# Altium PCB IMU_board_rev2.PcbDoc
Units mil, origin at the board's own origin, x right, y up, seen from the top; angles counter-clockwise.
Board outline 2805 x 1891.31 mil, 2 copper layers (Top Layer, Bottom Layer); 43 components, 29 nets, 150 pads, 25 vias.
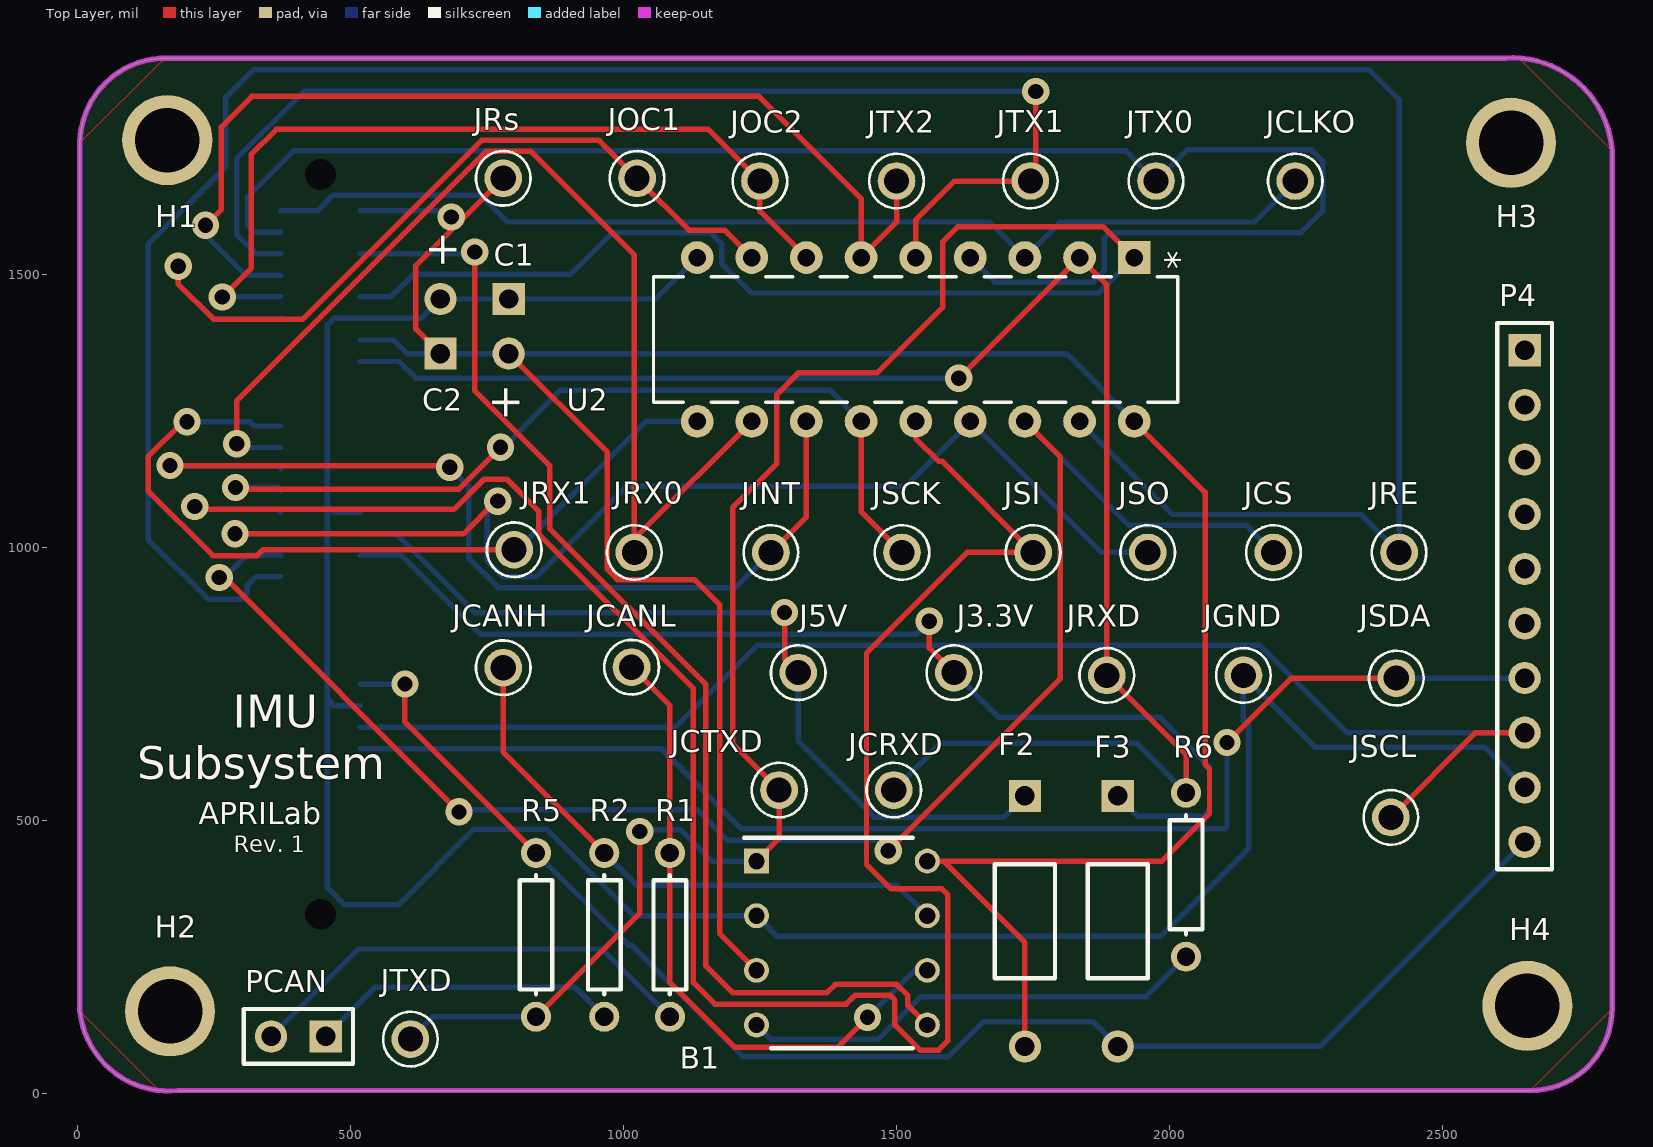
[diagram p0: Top Layer view]
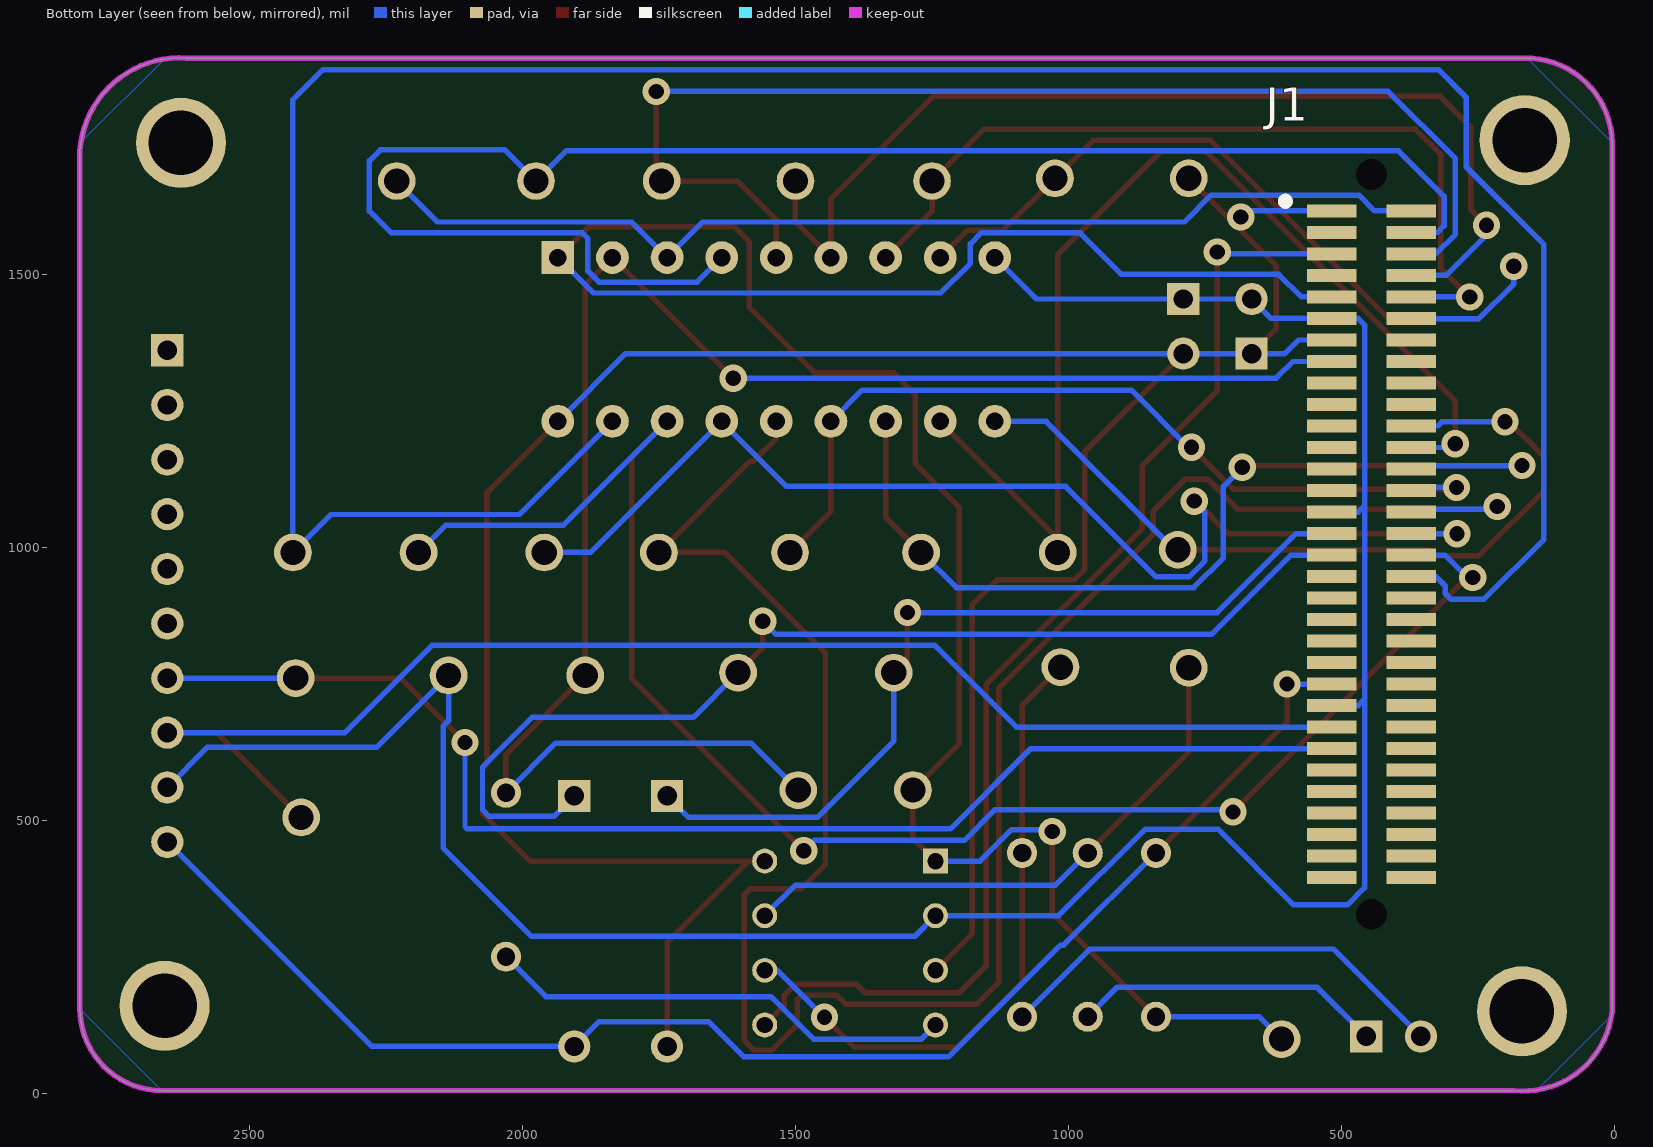
[diagram p1: Bottom Layer view, seen from below]

## Layer stack, top to bottom
Top Solder: solder mask 0.4, Solder Resist, Dk 3.5
Top Layer: signal copper 1.4
Dielectric 1: dielectric 12.6, FR-4, Dk 4.8
Bottom Layer: signal copper 1.4
Bottom Solder: solder mask 0.4, Solder Resist, Dk 3.5

## Board outline
5,150.94 5,1740.94 cw(c162.5,1738.44) 165,1895.94 2615,1895.94 cw(c2627.5,1713.44) 2810,1725.94 2810,155.94 cw(c2660,155.94) 2660,5.94 185,5.94 cw(c167.5,168.44)

## Design rules (kind name [scope] priority, off if disabled: settings)
Clearance [All] p1: gap=10 ignorepadtopadclearanceinfootprint=FALSE except(0: Arc-Hole Track-Hole SMDPad-Hole THPad-Hole Via-Hole Fill-Hole Poly-Hole Region-Hole Text-Hole)
MinimumSolderMaskSliver [All] p1: minsoldermaskwidth=5
PolygonConnect [All] p1: connectstyle=Relief reliefconductorwidth=10 reliefentries=4 polygonreliefangle="90 Angle" airgapwidth=10
RoutingVias [All] p1: holewidth=28 width=50 viastyle="Through Hole" minholewidth=28 minwidth=50 maxholewidth=28 maxwidth=50
SolderMaskExpansion [All] p1: expansion=4 istentingtop=FALSE
Width [All] p1: maxlimit=10 minlimit=10 preferedwidth=10
29 further rules are at their usual default settings.

## Components (designator, comment, footprint, x,y, rotation, side; value= is the part's Value field where it differs from the comment)
B1 "MCP2551-I_P" DIP794W56P254L946H432Q8N 1400,275.94 r0 top
C1 "Cap" "Cap Pol" 790,1455 r270 top value=100nF
C2 "Cap Pol1" "Cap Pol" 665,1355 r90 top value=50uF
F2 "Fuse 2" PIN-W2/E2.8 1735,315.94 r270 top
F3 "Fuse 1" PIN-W2/E2.8 1905,315.94 r270 top
H1 "Hole 3mm" "Hole 3mm" 165,1745.94 r0 top
H2 "Hole 3mm" "Hole 3mm" 170,150.94 r0 top
H3 "Hole 3mm" "Hole 3mm" 2625,1740.94 r0 top
H4 "Hole 3mm" "Hole 3mm" 2655,160.94 r0 top
J1 "0714360164" 0714360164 445.63,1005.94 r270 bottom
J3.3V "5000" KEYSTONE_5000 1605,770.94 r90 top
J5V "5000" KEYSTONE_5000 1320,770.94 r0 top
JCANH "5000" KEYSTONE_5000 780,780 r90 top
JCANL "5000" KEYSTONE_5000 1015,780.94 r90 top
JCLKO "5000" KEYSTONE_5000 2230,1670.94 r270 top
JCRXD "5000" KEYSTONE_5000 1495,555.94 r90 top
JCS "5000" KEYSTONE_5000 2190,990.94 r0 top
JCTXD "5000" KEYSTONE_5000 1285,555.94 r90 top
JGND "5000" KEYSTONE_5000 2135,765.94 r90 top
JINT "5000" KEYSTONE_5000 1270,990.94 r90 top
JOC1 "5000" KEYSTONE_5000 1025,1675.94 r180 top
JOC2 "5000" KEYSTONE_5000 1250,1670.94 r270 top
JRE "5000" KEYSTONE_5000 2420,990.94 r0 top
JRs "5000" KEYSTONE_5000 780,1675.94 r180 top
JRX0 "5000" KEYSTONE_5000 1020,990.94 r90 top
JRX1 "5000" KEYSTONE_5000 800,995.94 r0 top
JRXD "5000" KEYSTONE_5000 1885,765.94 r90 top
JSCK "5000" KEYSTONE_5000 1510,990.94 r90 top
JSCL "5000" KEYSTONE_5000 2405,505.94 r90 top
JSDA "5000" KEYSTONE_5000 2415,760.94 r90 top
JSI "5000" KEYSTONE_5000 1750,990.94 r0 top
JSO "5000" KEYSTONE_5000 1960,990.94 r0 top
JTX0 "5000" KEYSTONE_5000 1975,1670.94 r270 top
JTX1 "5000" KEYSTONE_5000 1745,1670.94 r180 top
JTX2 "5000" KEYSTONE_5000 1500,1670.94 r270 top
JTXD "5000" KEYSTONE_5000 610,100 r90 top
P4 "IMU MPU6050" HDR1X10 2650,1360.94 r270 top
PCAN "Header 2" HDR1X2 455,105 r180 top
R1 "Res1" AXIAL-0.3 1085,290.94 r90 top value=0
R2 "Res1" AXIAL-0.3 965,290.94 r90 top value=120
R5 "Res1" AXIAL-0.3 840,290.94 r90 top value=40
R6 "Res1" AXIAL-0.3 2030,400.94 r90 top value=150
U2 "MCP2510-I/P SPI Interface" PDIP18_300MC_MCH 1935,1530.94 r270 top

## Footprints (in the part's own frame and the unit in brackets; to place one, negate y for a bottom-side part, rotate by r counter-clockwise, add the part's x,y. Pads: shape width x height; smd on the part's side, far side on the other; paste and mask are expansions set on the pad)
0714360164 [mm]
  rect 0.6x2.3 smd: 1(-15.5,-1.85) 2(-15.5,1.85) 3(-14.5,-1.85) 4(-14.5,1.85) 5(-13.5,-1.85) 6(-13.5,1.85) 7(-12.5,-1.85) 8(-12.5,1.85) 9(-11.5,-1.85) 10(-11.5,1.85) 11(-10.5,-1.85) 12(-10.5,1.85) 13(-9.5,-1.85) 14(-9.5,1.85) 15(-8.5,-1.85) 16(-8.5,1.85) 17(-7.5,-1.85) 18(-7.5,1.85) 19(-6.5,-1.85) 20(-6.5,1.85) 21(-5.5,-1.85) 22(-5.5,1.85) 23(-4.5,-1.85) 24(-4.5,1.85) 25(-3.5,-1.85) 26(-3.5,1.85) 27(-2.5,-1.85) 28(-2.5,1.85) 29(-1.5,-1.85) 30(-1.5,1.85) 31(-0.5,-1.85) 32(-0.5,1.85) 33(0.5,-1.85) 34(0.5,1.85) 35(1.5,-1.85) 36(1.5,1.85) 37(2.5,-1.85) 38(2.5,1.85) 39(3.5,-1.85) 40(3.5,1.85) 41(4.5,-1.85) 42(4.5,1.85) 43(5.5,-1.85) 44(5.5,1.85) 45(6.5,-1.85) 46(6.5,1.85) 47(7.5,-1.85) 48(7.5,1.85) 49(8.5,-1.85) 50(8.5,1.85) 51(9.5,-1.85) 52(9.5,1.85) 53(10.5,-1.85) 54(10.5,1.85) 55(11.5,-1.85) 56(11.5,1.85) 57(12.5,-1.85) 58(12.5,1.85) 59(13.5,-1.85) 60(13.5,1.85) 61(14.5,-1.85) 62(14.5,1.85) 63(15.5,-1.85) 64(15.5,1.85)
  round 0.715 hole 1.43 unplated: MH1(-17.2,0) MH2(17.2,0)
  silkscreen extent -16,-4.05 -15.9,-3.95
AXIAL-0.3 [mm] "Axial Device, Thru-Hole; 2 Leads; 0.3 in Pin Spacing"
  round 1.4 hole 0.85: 1(-3.81,0) 2(3.81,0)
  silkscreen extent -2.77,-0.76 2.77,0.76
"Cap Pol" [mm]
  rect 1.5x1.5 hole 0.9: 1(0,0)
  round 1.5 hole 0.9: 2(2.54,0)
DIP794W56P254L946H432Q8N [mm]
  rect 1.16x1.16 / inner round 1.16 / far side rect 1.16x1.16 hole 0.76: 1(-3.97,3.81)
  round 1.16 hole 0.76: 2(-3.97,1.27) 3(-3.97,-1.27) 4(-3.97,-3.81) 5(3.97,-3.81) 6(3.97,-1.27) 7(3.97,1.27) 8(3.97,3.81)
  silkscreen extent -4.55,-4.89 3.3,4.89
HDR1X2 [mm] "Connector; Header; 2 Position"
  rect 1.5x1.5 hole 0.9: 1(0,0)
  round 1.5 hole 0.9: 2(2.54,0)
  silkscreen extent -1.27,-1.27 3.81,1.27
HDR1X10 [mm] "Connector; Header; 10 Position"
  rect 1.5x1.5 hole 0.9: 1(0,0)
  round 1.5 hole 0.9: 2(2.54,0) 3(5.08,0) 4(7.62,0) 5(10.16,0) 6(12.7,0) 7(15.24,0) 8(17.78,0) 9(20.32,0) 10(22.86,0)
  silkscreen extent -1.27,-1.27 24.13,1.27
"Hole 3mm" [mil]
  round 165 hole 118.11: 1(0,0)
KEYSTONE_5000 [mm]
  round 1.755 hole 1.17: 1(0,0)
  silkscreen extent -1.27,-1.27 1.27,1.27
PDIP18_300MC_MCH [mil]
  rect 60x60 hole 32 mask+0: 1(0,0)
  round 60 hole 32 mask+0: 2(0,-100) 3(0,-200) 4(0,-300) 5(0,-400) 6(0,-500) 7(0,-600) 8(0,-700) 9(0,-800) 10(300,-800) 11(300,-700) 12(300,-600) 13(300,-500) 14(300,-400) 15(300,-300) 16(300,-200) 17(300,-100) 18(300,0)
  silkscreen extent 35,-880 265,80, body extent -5,-875 315,75, height 205
PIN-W2/E2.8 [mm] "Thru-Hole; 2 Leads"
  rect 1.5x1.5 hole 0.9: 1(-5.825,0)
  round 1.5 hole 0.9: 2(5.825,0)
  silkscreen extent -2.65,-1.4 2.65,1.4

## Part data
B1: "High Speed CAN Transceiver,MCP2551-I/P Microchip MCP2551-I/P, CAN Transceiver 1-channel ISO 11898, 8-Pin PDIP", Arrow Part Number=MCP2551-I/P, Manufacturer_Name=Microchip, Mouser Part Number=579-MCP2551-I/P, Arrow Price/Stock=https://www.arrow.com/en/products/mcp2551-ip/microchip-technology?region=nac, Datasheet Link=http://www.mouser.com/ds/2/268/21667d-63675.pdf, Geometry.Height=4.32mm, Manufacturer_Part_Number=MCP2551-I/P, Mouser Price/Stock=https://www.mouser.co.uk/ProductDetail/Microchip-Technology-Atmel/MCP2551-I-P?qs=8g3RLJaa2Uis1lC9gEMPXA%3D%3D
C1: "Capacitor", LatestRevisionDate=17-Jul-2002, LatestRevisionNote="Re-released for DXP Platform.", PackageDescription="Radial Cap, Thru-Hole; 2 Leads; 0.3 in Pin Spacing", PackageReference=RAD-0.3, Published=8-Jun-2000, Publisher="Altium Limited"
C2: "Polarized Capacitor (Radial)", LatestRevisionDate=17-Jul-2002, LatestRevisionNote="Re-released for DXP Platform.", PackageDescription="Polarized Capacitor (Radial); 2 Leads", PackageReference=RB7.6-15, Published=8-Jun-2000, Publisher="Altium Limited"
F2: library part "Fuse 1", "Fuse", LatestRevisionDate=17-Jul-2002, LatestRevisionNote="Re-released for DXP Platform.", PackageDescription="Thru-Hole; 2 Leads", PackageReference=PIN-W2/E2.8, Published=8-Jun-2000, Publisher="Altium Limited"
F3: "Fuse", LatestRevisionDate=17-Jul-2002, LatestRevisionNote="Re-released for DXP Platform.", PackageDescription="Thru-Hole; 2 Leads", PackageReference=PIN-W2/E2.8, Published=8-Jun-2000, Publisher="Altium Limited"
J1: "Board to Board & Mezzanine Connectors 1.00MM PLG 02X32P VT SMT", Manufacturer_Name=Molex, Mouser Part Number=N/A, Arrow Part Number=0714360164, Arrow Price/Stock=https://www.arrow.com/en/products/0714360164/molex, Datasheet Link=https://www.molex.com/pdm_docs/sd/714360164_sd.pdf, Geometry.Height=7.48mm, Manufacturer_Part_Number=0714360164, Mouser Price/Stock=https://www.mouser.com/Search/Refine.aspx?Keyword=N%2FA
J3.3V J5V JCANH JCANL JCLKO JCRXD JCS JCTXD JGND JINT JOC1 JOC2 JRE JRs JRX0 JRX1 JRXD JSCK JSCL JSDA JSI JSO JTX0 JTX1 JTX2 JTXD: Package="Custom Package Ohmite", Availability=Good, MF=Keystone, MP=5000, Price=None, Purchase-URL=https://pricing.snapeda.com/search/part/5000/?ref=eda, SnapEDA_Link=https://www.snapeda.com/parts/5000/Keystone/view-part/883846/?ref=snap
P4: library part "Header 10", "Header, 10-Pin", LatestRevisionDate=17-Jul-2002, LatestRevisionNote="Re-released for DXP Platform.", Publisher="Altium Limited"
PCAN: "Header, 2-Pin", LatestRevisionDate=17-Jul-2002, LatestRevisionNote="Re-released for DXP Platform.", Publisher="Altium Limited"
R1 R2 R5 R6: "Resistor", LatestRevisionDate=17-Jul-2002, LatestRevisionNote="Re-released for DXP Platform.", PackageDescription="Axial Device, Thru-Hole; 2 Leads; 0.3 in Pin Spacing", PackageReference=AXIAL-0.3, Published=8-Jun-2000, Publisher="Altium Limited"
U2: library part MCP2510-I/P, "No Description Available", Mfr_Name=Microchip, Copyright="Copyright (C) 2022 Ultra Librarian. All rights reserved.", Manufacturer_Part_Number=MCP2510-I/P, RefDes=RefDes, Type=DEV

## Via types
v1: diameter 50, hole 28, Top Layer to Bottom Layer, 25 vias

## Nets (pads, with @x,y where several pads share a name; then routed paths per layer and width w, separated by ;. In a path a pad name is that pad's centre, name@x,y a point inside that pad or via, vN(x,y) a via of type N, cw(c..) or ccw(c..) an arc to the next point about the centre after c; other vN are vias at no path point)
"3.3 V": F3.2 J1.45 P4.10 R5.2 | length 2654.9
  Top Layer w10: v1(600,750.03) 600,680.94 R5.2
  Bottom Layer w10: J1.45 v1(600,750.03) ; R5.2 1008.94,272 1015,272 1219,68 1595,68 1659,132 1859.61,132 F3.2 2275.67,86.61 P4.10
"5 V": B1.3 B1.8 C1.2 C2.1 F2.2 J1.1 J1.13 JRs.1 U2.18 | length 5197.8
  Top Layer w10: C2.1 620,1400 620,1515.94 685,1580.94 v1(685,1605) 709.06,1605 JRs.1 ; C1.2 970.45,1174.55 970.45,960 989.06,941.39 1130,941.39 1176,895.39 1176,293.64 B1.3 ; B1.8 1585.99,425.94 ; F2.2 1735,276.93 1585.99,425.94 ; U2.18 2064.85,1101.09 2064.85,602.94 2073,594.79 2073,513 1985.94,425.94 1585.99,425.94
  Bottom Layer w10: J1.13 579,1379.96 603.96,1355 C2.1 C1.2 1810.94,1355 U2.18 ; J1.1 673.82,1616.18 v1(685,1605)
GND: B1.2 C1.1 C2.2 J1.11 J1.29 J1.47 JGND.1 P4.9 U2.9 | length 4714.4
  Bottom Layer w10: J1.47 470,710.66 458,722.66 ; J1.29 470,1064.99 458,1076.99 ; U2.9 1059.06,1455 C1.1 C2.2 629.33,1419.33 J1.11 470,1419.33 458,1407.33 458,1076.99 ; P4.9 2576.94,634 2266.94,634 JGND.1 2135,682.94 2145,672.94 2145,450 1983,288 1281.64,288 B1.2 1018.06,325.94 860,484 726,484 588,346 489.43,346 458,377.43 458,722.66 ; 458,722.66 458,1076.99
NetB1_4: B1.4 R6.1 | length 859.6
  Bottom Layer w10: B1.4 1269.64,100 1467,100 1545,178 1957.06,178 R6.1
NetB1_5: B1.5 J1.5 | length 2166.8
  Top Layer w10: v1(728,1541) 728,1287 865,1150 865,1035 1151,749 1151,234 1200,185 1372.58,185 1387.92,200.34 1500.31,200.34 1520.65,180 1520.65,161.59 B1.5
  Bottom Layer w10: J1.5 724.44,1537.44 v1(728,1541)
NetB1_6: B1.6 JCANL.1 R1.2 | length 1184.9
  Top Layer w10: JCANL.1 1085,710.94 R1.2 1085,204 1204,85 1392,85 v1(1447,140)
  Bottom Layer w10: v1(1447,140) 1532.94,225.94 B1.6
NetB1_7: B1.7 JCANH.1 R2.2 | length 1054.6
  Top Layer w10: JCANH.1 780,625.94 R2.2
  Bottom Layer w10: R2.2 1023.94,382 1500.24,382 B1.7
NetF2_1: F2.1 J1.31 J5V.1 | length 1571.1
  Top Layer w10: v1(1295,881) 1295,795.94 J5V.1
  Bottom Layer w10: J1.31 583.28,1025.62 727.9,881 v1(1295,881) ; J5V.1 1320,646 1460,506 1695.73,506 F2.1
NetF3_1: F3.1 J1.33 J3.3V.1 | length 2030.4
  Top Layer w10: v1(1560,865) 1560,815.94 J3.3V.1
  Bottom Layer w10: J1.33 593,986.25 738.25,841 1536,841 v1(1560,865) ; J3.3V.1 1686.94,689 1982,689 2073,598 2073,520 2061,508 1942.27,508 F3.1
NetJ1_2: J1.2 JCLKO.1 U2.3 | length 1974.4
  Bottom Layer w10: J1.2 439.72,1616.18 468.55,1645 739,1645 788.06,1595.94 1670,1595.94 U2.3 1800,1595.94 2155,1595.94 JCLKO.1
NetJ1_4: J1.4 JTX0.1 U2.4 | length 3020.6
  Bottom Layer w10: J1.4 325.08,1576.81 312.52,1589.36 312.52,1642.99 395.79,1726.26 1919.68,1726.26 JTX0.1 2032.06,1728 2260,1728 2280,1708 2280,1615.94 2240,1575.94 1890,1575.94 1880,1565.94 1880,1505.94 1860,1485.94 1680,1485.94 U2.4
NetJ1_6: J1.6 JTX1.1 U2.5 | length 2224.9
  Top Layer w10: U2.5 1535,1600 1605.94,1670.94 JTX1.1 1755,1680.94 v1(1755,1835)
  Bottom Layer w10: J1.6 328,1537.44 292,1573.44 292,1712 415,1835 v1(1755,1835)
NetJ1_8: J1.8 JTX2.1 U2.6 | length 1925.2
  Top Layer w10: v1(235,1590) 264,1619 264,1770 320,1826 1248,1826 1435,1639 U2.6 1500,1595.94 JTX2.1
  Bottom Layer w10: v1(235,1590) 235,1571.7 308.64,1498.07 J1.8
NetJ1_10: J1.10 JOC2.1 U2.7 | length 1554.7
  Top Layer w10: v1(265.69,1458.7) 319,1512 319,1720 364.49,1765.49 1155.45,1765.49 JOC2.1 1250,1615.94 U2.7
  Bottom Layer w10: v1(265.69,1458.7) J1.10
NetJ1_12: J1.12 JOC1.1 U2.8 | length 1580.3
  Top Layer w10: v1(185,1515) 185,1482.82 249.82,1418 413.15,1418 740.64,1745.49 955.45,1745.49 JOC1.1 1119.94,1581 1184.94,1581 U2.8
  Bottom Layer w10: v1(185,1515) 185,1482.82 249.13,1418.7 372.16,1418.7 J1.12
NetJ1_22: J1.22 JRX1.1 U2.10 | length 1491.2
  Top Layer w10: v1(201,1230) 193.43,1230 130,1166.57 130,1103.43 248.43,985 329.31,985 340.25,995.94 JRX1.1
  Bottom Layer w10: v1(201,1230) 316.48,1230 324,1222.48 J1.22 ; JRX1.1 805.94,995.94 1040.94,1230.94 U2.10
NetJ1_24: J1.24 JRX0.1 U2.11 | length 2029.1
  Top Layer w10: v1(292,1190) 292,1268.57 748.92,1725.49 830,1725.49 1020,1535.49 JRX0.1 1029.55,1025.49 U2.11
  Bottom Layer w10: v1(292,1190) 298.89,1183.11 J1.24
NetJ1_26: J1.26 JINT.1 U2.12 | length 1768.7
  Top Layer w10: v1(170,1150) 679,1150 v1(682,1147) ; JINT.1 1335,1055.94 U2.12
  Bottom Layer w10: v1(170,1150) 366.53,1150 J1.26 ; v1(682,1147) 716.85,1112.15 716.85,980.73 771.19,926.39 1205.45,926.39 JINT.1
NetJ1_28: J1.28 JSCK.1 U2.13 | length 1601
  Top Layer w10: v1(290,1110) 293,1107 698.57,1107 v1(775,1183.43) ; U2.13 1435,1065.94 JSCK.1
  Bottom Layer w10: v1(290,1110) 367.16,1110 J1.28 ; v1(775,1183.43) 780.43,1183.43 885,1288 1377.94,1288 U2.13
NetJ1_30: J1.30 JSI.1 U2.14 | length 3925.4
  Top Layer w10: v1(215,1075) 220,1070 689.85,1070 744.85,1125 786.57,1125 845,1066.57 845,1025 1128,742 1128,203.5 1167.5,164 1407.92,164 1424.26,180.34 1487.92,180.34 1496.86,171.4 1496.86,126.14 1543,80 1577,80 1594.14,97.14 1594.14,364 1583.14,375 1490,375 1445,420 1445,806.57 1629.37,990.94 JSI.1 1582.94,1158 1577,1158 1535,1200 U2.14
  Bottom Layer w10: v1(215,1075) 220,1070 367.79,1070 J1.30
NetJ1_32: J1.32 JSO.1 U2.15 | length 2146.4
  Top Layer w10: v1(289,1025) 706.85,1025 766.85,1085 v1(770,1085)
  Bottom Layer w10: v1(289,1025) 289.62,1025.62 J1.32 ; v1(770,1085) 750.45,1065.45 750.45,975.42 779.48,946.39 840,946.39 1005.61,1112 1516.06,1112 U2.15 1875,990.94 JSO.1
NetJ1_34: J1.34 JCS.1 U2.16 | length 3065.1
  Top Layer w10: v1(260,945) 265,945 267.5,947.5 v1(699,516) ; v1(1485,445) 1800,760 1800,1165.94 U2.16
  Bottom Layer w10: v1(260,945) 270,945 272.5,947.5 311.25,986.25 J1.34 ; v1(699,516) 703,520 1134.61,520 1190.61,464 1466,464 v1(1485,445) ; U2.16 1925.45,1040.49 2140.45,1040.49 JCS.1
NetJ1_36: J1.36 JRE.1 U2.17 | length 4887.4
  Bottom Layer w10: J1.36 327.32,946.88 310.44,930 310.44,915.43 300,904.99 240,904.99 130,1014.99 130,1555 272,1697 272,1824 323,1875 2365,1875 2420,1820 JRE.1 2350.45,1060.49 2005.45,1060.49 U2.17
NetPCAN_1: PCAN.1 R2.1 | length 569.7
  Bottom Layer w10: PCAN.1 545,195 910.94,195 R2.1
NetPCAN_2: PCAN.2 R1.1 | length 847.7
  Bottom Layer w10: PCAN.2 515,265 960.94,265 R1.1
RXD: J1.15 JCRXD.1 JRXD.1 R6.2 U2.2 | length 3089.9
  Top Layer w10: v1(1614.06,1310) U2.2 1885,1480.94 JRXD.1 2030,620.94 R6.2
  Bottom Layer w10: J1.15 589.41,1340.59 620,1310 v1(1614.06,1310) ; JCRXD.1 1581.06,642 1938.94,642 R6.2
SCL: J1.49 JSCL.1 P4.8 | length 2569
  Top Layer w10: JSCL.1 2560,660.94 P4.8
  Bottom Layer w10: J1.49 1095.29,671.29 1245,821 2165,821 2325.06,660.94 P4.8
SDA: J1.51 JSDA.1 P4.7 | length 2396.9
  Top Layer w10: v1(2105,643) 2222.94,760.94 JSDA.1
  Bottom Layer w10: J1.51 1069.28,631.92 1216.2,485 2101,485 2105,489 v1(2105,643) ; JSDA.1 P4.7
TXD: B1.1 J1.9 JCTXD.1 JTXD.1 R5.1 U2.1 | length 4277
  Top Layer w10: R5.1 1030,330.94 v1(1030,480) ; B1.1 1285,467.24 JCTXD.1 1200,640.94 1200,1073 1281,1154 1281,1280 1321,1320 1465,1320 1585,1440 1585,1560 1612,1587 1878.94,1587 U2.1
  Bottom Layer w10: J1.9 574,1458.7 615.3,1500 903,1500 978.94,1575.94 1160,1575.94 1180,1555.94 1180,1520 1234.06,1465.94 1870,1465.94 U2.1 ; JTXD.1 650.94,140.94 R5.1 ; v1(1030,480) 1033.5,483.5 1104.5,483.5 1162.06,425.94 B1.1
pads on no net: H1.1 H2.1 H3.1 H4.1 J1.3 J1.7 J1.14 J1.16 J1.17 J1.18 J1.19 J1.20 J1.21 J1.23 J1.25 J1.27 J1.35 J1.37 J1.38 J1.39 J1.40 J1.41 J1.42 J1.43 J1.44 J1.46 J1.48 J1.50 J1.52 J1.53 J1.54 J1.55 J1.56 J1.57 J1.58 J1.59 J1.60 J1.61 J1.62 J1.63 J1.64 J1.MH1 J1.MH2 P4.1 P4.2 P4.3 P4.4 P4.5 P4.6

## Polygon pours and split planes (outlines as drawn)
"5 V" on Top Layer "NONET_L-01_P-001" (hatched 45Degree grid 20 track 8, shelved, pour order 0): 5,1740.94 160,1895.94 2640,1895.94 2810,1725.94 2810,155.94 2660,5.94 150,5.94 5,150.94
GND on Bottom Layer "NONET_L-01_P-001" (hatched 45Degree grid 20 track 8, shelved, pour order 1): 5,1740.94 160,1895.94 2654.06,1895.94 2810,1740 2810,155.94 2660,5.94 145.94,5.94 145,5 5,145

## Keep-outs
Keep-Out Layer:
  the board outline again, w10

## Silkscreen, mask and mechanical layers (free items; w line width, h text height)
Top Overlay:
  text "IMU" at 285,670 h60
  text "Subsystem" at 110,575.93 h60
  text "APRILab" at 223,493 h40
  text "Rev. 1" at 287,442 h30
Mechanical 1:
  lines w10: 150,5.94 185,5.94 ; 185,5.94 cw(c167.5,168.44) 5,150.94 5,1740.94 cw(c162.5,1738.44) 165,1895.94 2615,1895.94 cw(c2627.5,1713.44) 2810,1725.94 2810,155.94 cw(c2660,155.94) 2660,5.94 185,5.94

## Text inside footprints (layer, text, board x,y; h text height)
C1: Top Overlay "+" at 760,1300 h60 r270
C2: Top Overlay "+" at 695,1510 h60 r90
U2: Top Overlay "*" at 1970,1543.44 h50 r270; Mechanical 13 "*" at 1910,1493.44 h50 r270